# EAGLE board TSC PROJECT_1 v7 (EAGLE 9.7.0)
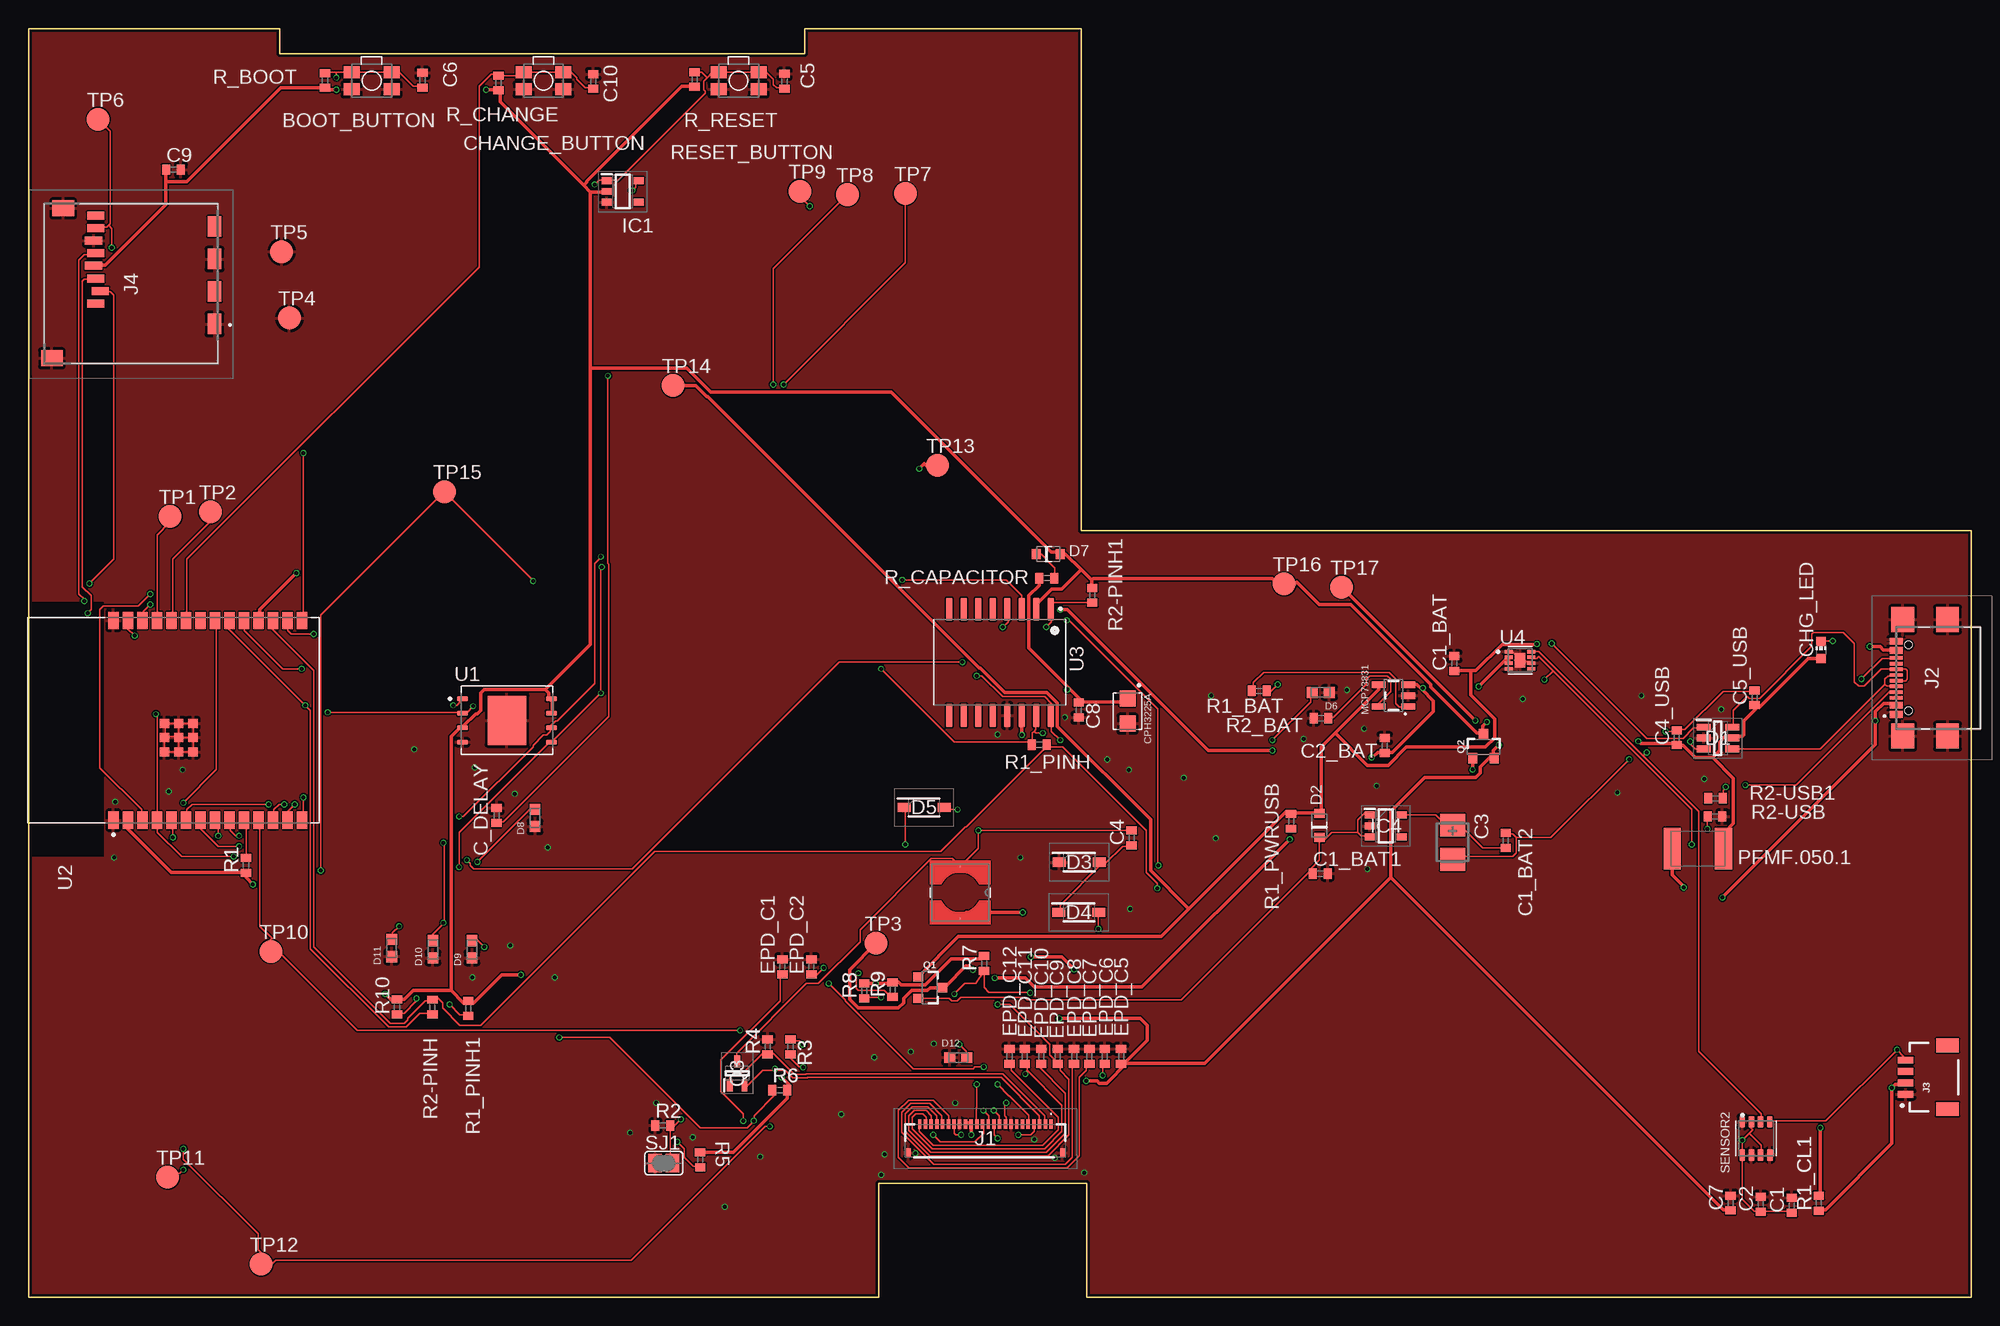
[diagram p0: board, top side]
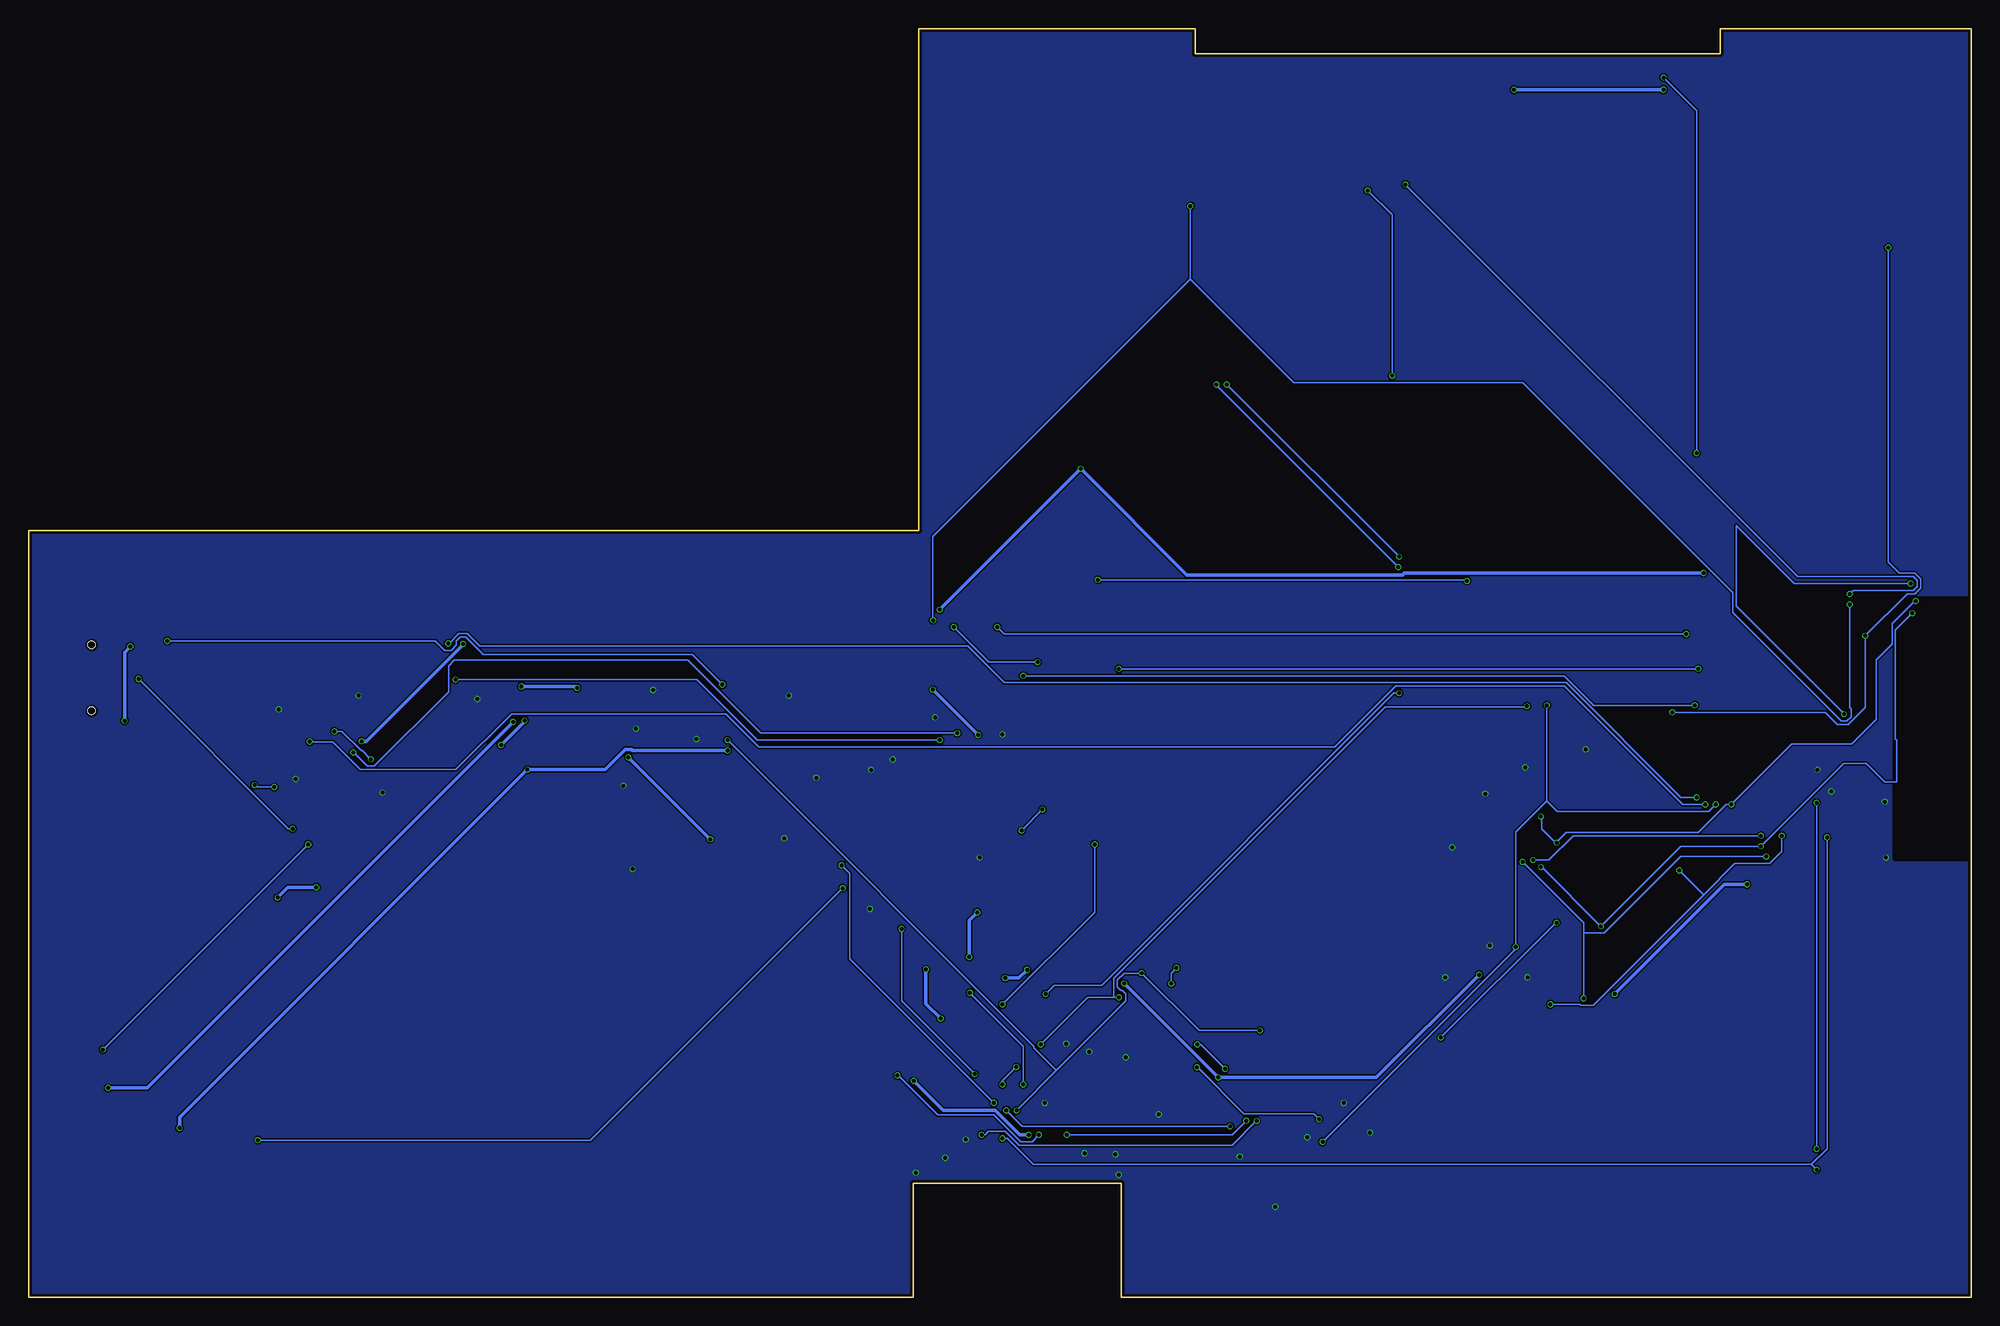
[diagram p1: board, bottom side, seen from below]

Size 170.2 x 111.2 mm. Coordinates in mm from the lower left corner, seen from the top.
Outline: 0,111.2 22,111.2 22,108.99 68,108.99 68,111.2 92.2,111.2 92.2,67.2 170.2,67.2 170.2,0 92.71,0 92.7,10 74.5,10 74.5,0 0,0 0,111.2
Copper layers (1*16): Top 0.035mm / dielectric 1.6mm / Bottom 0.035mm
Design rules "jlcpcb-2layers": minimum track width 5mil, minimum drill 0.3mm, track to track 5mil, track to pad 5mil, pad to pad 5mil, via to via 5mil, smd to smd 5mil, copper to edge 0.2mm, drill to drill 6mil, minimum pad ring 10mil, minimum via ring 3mil, stop-mask expansion 4mil, vias tented up to drill 0mil, thermal gap 10mil

## Footprints (pad centres in the part's own frame; a part is rotated, then mirrored left to right if it is on the bottom)
MYBUTTON = smd 1.4 x 1.05: 1 1.75,0.75; 2 -1.75,0.75; 3 -1.75,-0.75; 4 1.75,-0.75
EAGLE-LTSPICE_C0402 = smd 0.7 x 0.9: 1 -0.65,0; 2 0.65,0
RCL_CT3528 = smd 2 x 2.2: + -1.5,0; - 1.5,0
ADAFRUIT_CHIP-LED0603 = smd 0.8 x 0.8: A 0,-0.75; C 0,0.75
CAPCP3225X100N = smd 1.4 x 1.4: 1 -1.1,0; 2 1.1,0
SOT95P280X145-6N = smd 1.2 x 0.6: 1 -1.25,0.95; 2 -1.25,0; 3 -1.25,-0.95; 4 1.25,-0.95; 5 1.25,0; 6 1.25,0.95
ESP32_WROVER_AVX---SD0805S020S1R0_AVX_SD0805S020S1R0_0 = smd 0.8 x 0.9: 1 -1.05,0; 2 1.05,0
SOD3716X135N = smd 1.15 x 0.8: 1 -1.75,0; 2 1.75,0
DIOC1608X36N = smd 0.97 x 0.94: 1 -0.75,0; 2 0.75,0
SOT95P280X125-5N = smd 0.9 x 0.6: 1 -1.4,0.95; 2 -1.4,0; 3 -1.4,-0.95; 4 1.4,-0.95; 5 1.4,0.95
SOT95P280X120-5N = smd 0.9 x 0.6: 1 -1.4,0.95; 2 -1.4,0; 3 -1.4,-0.95; 4 1.4,-0.95; 5 1.4,0.95
FH34SRJ24S05SH99 = smd 0.3 x 0.8: 1 5.75,1.45; 2 5.25,1.45; 3 4.75,1.45; 4 4.25,1.45; 5 3.75,1.45; 6 3.25,1.45; 7 2.75,1.45; 8 2.25,1.45; 9 1.75,1.45; 10 1.25,1.45; 11 0.75,1.45; 12 0.25,1.45; 13 -0.25,1.45; 14 -0.75,1.45; 15 -1.25,1.45; 16 -1.75,1.45; 17 -2.25,1.45; 18 -2.75,1.45; 19 -3.25,1.45; 20 -3.75,1.45; 21 -4.25,1.45; 22 -4.75,1.45; 23 -5.25,1.45; 24 -5.75,1.45 | smd 0.4 x 0.8: MP1 6.75,-1.05; MP2 -6.75,-1.05
SAMACSYS_PARTS_USB4110GFA = smd 0.3 x 1.15: A1 -3.35,3.678; A4 -2.55,3.678; A5 -1.25,3.678; A6 -0.25,3.678; A7 0.25,3.678; A8 1.25,3.678; A9 2.55,3.678; A12 3.35,3.678; B1 3.05,3.678; B4 2.25,3.678; B5 1.75,3.678; B6 0.75,3.678; B7 -0.75,3.678; B8 -1.75,3.678; B9 -2.25,3.678; B12 -3.05,3.678 | smd 2.18 x 2: MP1 -5.11,-0.827; MP2 5.11,-0.827; MP3 -5.11,3.103; MP4 5.11,3.103 | hole 0.65: -2.89,2.603; 2.89,2.603
JST04_1MM_RA = smd 0.6 x 1.35: 1 -1.5,0; 2 -0.5,0; 3 0.5,0; 4 1.5,0 | smd 1.2 x 2: NC1 2.8,-3.675; NC2 -2.8,-3.675
112ATAARR03ATTEND = smd 1.8 x 1.2: G1 10.6,10.4; G2 4.9,10.4; S1 7.75,10.4; S2 2.05,10.4 | smd 1.4 x 1.9: G3 13.6,-3.85; G4 0.45,-2.85 | smd 0.7 x 1.5: P1 8.8,0; P2 7.7,0.4; P3 6.6,0; P4 5.5,-0.2; P5 4.4,0; P6 3.3,-0.2; P7 2.2,0; P8 1.1,0
IND_4828-WE-TPC_WRE = smd 0.127 x 0.127: 1 -2.286,0; 2 2.286,0
ESP32_WROVER_SPARKFUN-IC-POWER_SOT23-5 = smd 0.55 x 1.2: 1 -0.95,-1.3; 2 0,-1.3; 3 0.95,-1.3; 4 0.95,1.3; 5 -0.95,1.3
ESP32C6_VARISTOR_CT/CN1812 = smd 1.5 x 3.6: 1 -2.25,0; 2 2.25,0
ESP32_WROVER_SPARKFUN-DISCRETESEMI_SOT23-3 = smd 0.8 x 0.9: 1 -0.95,-1; 2 0.95,-1; 3 0,1.1
SOT65P210X110-3N = smd 1.05 x 0.5: 1 -1.05,0.65; 2 -1.05,-0.65; 3 1.05,0
ESP32_WROVER_EAGLE-LTSPICE_R0402 = smd 0.7 x 0.9: 1 -0.65,0; 2 0.65,0
ESP32_WROVER_BME680_PSON80P300X300X100-8N = smd 1.016 x 0.5: 1 1.458,1.2; 2 1.458,0.4; 3 1.458,-0.4; 4 1.458,-1.2; 5 -1.458,-1.22; 6 -1.458,-0.4; 7 -1.458,0.4; 8 -1.458,1.2
SJ = smd 1.168 x 1.6: 1 -0.762,0; 2 0.762,0
TP20R = smd 2 x 2: TP 0,0
SON127P600X800X80-9N = smd 0.94 x 0.44: 1 -3.895,1.905; 2 -3.895,0.635; 3 -3.895,-0.635; 4 -3.895,-1.905; 5 3.895,-1.905; 6 3.895,-0.635; 7 3.895,0.635; 8 3.895,1.905 | smd 3.4 x 4.3: 9 0,0
XCVR_ESP32-C6-WROOM-1-N8 = smd 1.5 x 0.9: 1 -8.75,5.26; 2 -8.75,3.99; 3 -8.75,2.72; 4 -8.75,1.45; 5 -8.75,0.18; 6 -8.75,-1.09; 7 -8.75,-2.36; 8 -8.75,-3.63; 9 -8.75,-4.9; 10 -8.75,-6.17; 11 -8.75,-7.44; 12 -8.75,-8.71; 13 -8.75,-9.98; 14 -8.75,-11.25; 15 8.75,-11.25; 16 8.75,-9.98; 17 8.75,-8.71; 18 8.75,-7.44; 19 8.75,-6.17; 20 8.75,-4.9; 21 8.75,-3.63; 22 8.75,-2.36; 23 8.75,-1.09; 24 8.75,0.18; 25 8.75,1.45; 26 8.75,2.72; 27 8.75,3.99; 28 8.75,5.26 | smd 0.8 x 0.8: 29_1 -2.755,0.79; 29_2 -1.505,0.79; 29_3 -0.255,0.79; 29_4 -2.755,-0.46; 29_5 -1.505,-0.46; 29_6 -0.255,-0.46; 29_7 -2.755,-1.71; 29_8 -1.505,-1.71; 29_9 -0.255,-1.71
SOIC127P1032X265-16N = smd 2.05 x 0.59: 1 -4.655,4.445; 2 -4.655,3.175; 3 -4.655,1.905; 4 -4.655,0.635; 5 -4.655,-0.635; 6 -4.655,-1.905; 7 -4.655,-3.175; 8 -4.655,-4.445; 9 4.655,-4.445; 10 4.655,-3.175; 11 4.655,-1.905; 12 4.655,-0.635; 13 4.655,0.635; 14 4.655,1.905; 15 4.655,3.175; 16 4.655,4.445
SON50P200X200X80-9N = smd 0.76 x 0.27: 1 -0.985,0.75; 2 -0.985,0.25; 3 -0.985,-0.25; 4 -0.985,-0.75; 5 0.985,-0.75; 6 0.985,-0.25; 7 0.985,0.25; 8 0.985,0.75 | smd 0.9 x 1.3: 9 0,0

## Placement (x,y rotation side)
BOOT_BUTTON  BUTTON_CUSYOMV1  [MYBUTTON]  30.06,106.62 180 top
C1  [EAGLE-LTSPICE_C0402]  154.45,8.07 90 top
C1_BAT  [EAGLE-LTSPICE_C0402]  124.89,55.56 90 top
C1_BAT1  [EAGLE-LTSPICE_C0402]  113.16,37.14 0 top
C1_BAT2  [EAGLE-LTSPICE_C0402]  129.4,40.04 90 top
C2  [EAGLE-LTSPICE_C0402]  151.74,8.17 90 top
C2_BAT  [EAGLE-LTSPICE_C0402]  118.8,48.36 90 top
C3  [RCL_CT3528]  124.75,39.89 270 top
C4  [EAGLE-LTSPICE_C0402]  96.63,40.27 90 top
C4_USB  [EAGLE-LTSPICE_C0402]  144.39,49.05 90 top
C5  [EAGLE-LTSPICE_C0402]  66.22,106.57 90 top
C5_USB  [EAGLE-LTSPICE_C0402]  151.2,52.55 90 top
C6  [EAGLE-LTSPICE_C0402]  34.51,106.67 90 top
C7  [EAGLE-LTSPICE_C0402]  149.1,8.27 90 top
C8  [EAGLE-LTSPICE_C0402]  91.99,51.47 270 top
C9  [EAGLE-LTSPICE_C0402]  12.7,98.83 0 top
C10  [EAGLE-LTSPICE_C0402]  49.46,106.56 90 top
C_DELAY  [EAGLE-LTSPICE_C0402]  41,42.24 90 top
CHANGE_BUTTON  BUTTON_CUSYOMV1  [MYBUTTON]  45.11,106.62 180 top
CHG_LED  [ADAFRUIT_CHIP-LED0603]  157.02,56.74 0 top
CPH3225A  CPH3225A  [CAPCP3225X100N]  96.27,51.39 270 top
D1  USBLC6-2SC6Y  [SOT95P280X145-6N]  147.99,49.02 0 top
D2  ESP32_WROVER_AVX---SD0805S020S1R0_AVX_SD0805S020S1R0_0_0AVX_SD0805S020S1R0_0_0  [ESP32_WROVER_AVX---SD0805S020S1R0_AVX_SD0805S020S1R0_0]  113.08,41.35 90 top
D3  MBR0530  [SOD3716X135N]  92.04,38.14 0 top
D4  MBR0530  [SOD3716X135N]  92.01,33.75 0 top
D5  MBR0530  [SOD3716X135N]  78.45,42.95 0 top
D6  PGB1010603MR  [DIOC1608X36N]  113.19,53.02 180 top
D7  ESP32_WROVER_AVX---SD0805S020S1R0_AVX_SD0805S020S1R0_0_0AVX_SD0805S020S1R0_0_0  [ESP32_WROVER_AVX---SD0805S020S1R0_AVX_SD0805S020S1R0_0]  89.33,65.15 0 top
D8  PGB1010603MR  [DIOC1608X36N]  44.37,42.02 90 top
D9  PGB1010603MR  [DIOC1608X36N]  38.85,30.52 90 top
D10  PGB1010603MR  [DIOC1608X36N]  35.43,30.52 90 top
D11  PGB1010603MR  [DIOC1608X36N]  31.81,30.62 90 top
D12  PGB1010603MR  [DIOC1608X36N]  81.44,21.03 0 top
EPD_C1  [EAGLE-LTSPICE_C0402]  66.04,28.98 90 top
EPD_C2  [EAGLE-LTSPICE_C0402]  68.58,28.98 90 top
EPD_C5  [EAGLE-LTSPICE_C0402]  95.71,21.13 90 top
EPD_C6  [EAGLE-LTSPICE_C0402]  94.27,21.13 90 top
EPD_C7  [EAGLE-LTSPICE_C0402]  92.93,21.13 90 top
EPD_C8  [EAGLE-LTSPICE_C0402]  91.59,21.13 90 top
EPD_C9  [EAGLE-LTSPICE_C0402]  90.15,21.13 90 top
EPD_C10  [EAGLE-LTSPICE_C0402]  88.71,21.13 90 top
EPD_C11  [EAGLE-LTSPICE_C0402]  87.27,21.13 90 top
EPD_C12  [EAGLE-LTSPICE_C0402]  85.93,21.13 90 top
IC1  BD5229G-TR  [SOT95P280X125-5N]  52.06,96.92 0 top
IC4  XC6220A331MR-G  [SOT95P280X120-5N]  118.9,41.32 0 top
J1  FH34SRJ-24S-0.5SH_99_  [FH34SRJ24S05SH99]  83.82,13.74 0 top
J2  SAMACSYS_PARTS_USB4110-GF-A  [SAMACSYS_PARTS_USB4110GFA]  167.28,54.3 90 top
J3  QWIIC_RIGHT_ANGLE  [JST04_1MM_RA]  164.43,19.3 90 top
J4  112A-TAAR-R03_ATTEND  [112ATAARR03ATTEND]  5.89,95.9 270 top
L1  744043680IND_4828-WE-TPC_WRE  [IND_4828-WE-TPC_WRE]  81.62,35.49 270 top
MCP73831  ESP32_WROVER_SPARKFUN-IC-POWER_MCP73831  [ESP32_WROVER_SPARKFUN-IC-POWER_SOT23-5]  119.57,52.74 90 top
PFMF.050.1  ESP32C6_VARISTORCN1812  [ESP32C6_VARISTOR_CT/CN1812]  146.23,39.33 0 top
Q1  20V/4.2A/52mΩ/1.4W  [ESP32_WROVER_SPARKFUN-DISCRETESEMI_SOT23-3]  78.94,27.15 270 top
Q2  20V/4.2A/52mΩ/1.4W  [ESP32_WROVER_SPARKFUN-DISCRETESEMI_SOT23-3]  127.46,48.25 0 top
Q3  SI1308EDL-T1-GE3  [SOT65P210X110-3N]  62.08,19.65 90 top
R1  [ESP32_WROVER_EAGLE-LTSPICE_R0402]  19.05,37.87 90 top
R1_BAT  [ESP32_WROVER_EAGLE-LTSPICE_R0402]  107.81,53.16 0 top
R1_CL1  [ESP32_WROVER_EAGLE-LTSPICE_R0402]  156.83,8.26 90 top
R1_PINH  [ESP32_WROVER_EAGLE-LTSPICE_R0402]  88.54,48.44 0 top
R1_PINH1  [ESP32_WROVER_EAGLE-LTSPICE_R0402]  38.51,25.33 90 top
R1_PWRUSB  [ESP32_WROVER_EAGLE-LTSPICE_R0402]  110.6,41.73 90 top
R2  [ESP32_WROVER_EAGLE-LTSPICE_R0402]  55.56,15.07 0 top
R2-PINH  [ESP32_WROVER_EAGLE-LTSPICE_R0402]  35.38,25.45 90 top
R2-PINH1  [ESP32_WROVER_EAGLE-LTSPICE_R0402]  93.19,61.53 90 top
R2-USB  [ESP32_WROVER_EAGLE-LTSPICE_R0402]  147.74,42.16 0 top
R2-USB1  [ESP32_WROVER_EAGLE-LTSPICE_R0402]  147.78,43.74 0 top
R2_BAT  [ESP32_WROVER_EAGLE-LTSPICE_R0402]  113.22,50.76 0 top
R3  [ESP32_WROVER_EAGLE-LTSPICE_R0402]  66.75,21.97 270 top
R4  [ESP32_WROVER_EAGLE-LTSPICE_R0402]  64.74,21.97 90 top
R5  [ESP32_WROVER_EAGLE-LTSPICE_R0402]  58.83,12.07 90.7 top
R6  [ESP32_WROVER_EAGLE-LTSPICE_R0402]  65.82,18.17 0 top
R7  [ESP32_WROVER_EAGLE-LTSPICE_R0402]  83.71,29.27 90 top
R8  [ESP32_WROVER_EAGLE-LTSPICE_R0402]  73.2,26.87 90 top
R9  [ESP32_WROVER_EAGLE-LTSPICE_R0402]  75.69,26.97 90 top
R10  [ESP32_WROVER_EAGLE-LTSPICE_R0402]  32.28,25.46 90 top
R_BOOT  [ESP32_WROVER_EAGLE-LTSPICE_R0402]  25.97,106.65 90 top
R_CAPACITOR  [ESP32_WROVER_EAGLE-LTSPICE_R0402]  89.2,63.03 0 top
R_CHANGE  [ESP32_WROVER_EAGLE-LTSPICE_R0402]  41.17,106.43 90 top
R_RESET  [ESP32_WROVER_EAGLE-LTSPICE_R0402]  58.35,106.73 90 top
RESET_BUTTON  BUTTON_CUSYOMV1  [MYBUTTON]  62.2,106.62 180 top
SENSOR2  ESP32_WROVER_BME680_BME680  [ESP32_WROVER_BME680_PSON80P300X300X100-8N]  151.33,13.94 90 top
SJ1  [SJ]  55.65,11.77 0 top
TP1  TPTP20R  [TP20R]  12.4,68.44 0 top
TP2  TPTP20R  [TP20R]  15.92,68.84 0 top
TP3  TPTP20R  [TP20R]  74.24,31.04 0 top
TP4  TPTP20R  [TP20R]  22.86,85.84 0 top
TP5  TPTP20R  [TP20R]  22.18,91.64 0 top
TP6  TPTP20R  [TP20R]  6.1,103.24 0 top
TP7  TPTP20R  [TP20R]  76.82,96.74 0 top
TP8  TPTP20R  [TP20R]  71.74,96.64 0 top
TP9  TPTP20R  [TP20R]  67.56,96.94 0 top
TP10  TPTP20R  [TP20R]  21.22,30.32 0 top
TP11  TPTP20R  [TP20R]  12.18,10.54 0 top
TP12  TPTP20R  [TP20R]  20.37,2.92 0 top
TP13  TPTP20R  [TP20R]  79.62,72.92 0 top
TP14  TPTP20R  [TP20R]  56.47,79.92 0 top
TP15  TPTP20R  [TP20R]  36.42,70.62 0 top
TP16  TPTP20R  [TP20R]  109.98,62.54 0 top
TP17  TPTP20R  [TP20R]  115.03,62.24 0 top
U1  W25Q512JVEIQ  [SON127P600X800X80-9N]  41.91,50.57 0 top
U2  ESP32-C6-WROOM-1-N8  [XCVR_ESP32-C6-WROOM-1-N8]  12.7,50.57 90 top
U3  DS3231SN#  [SOIC127P1032X265-16N]  85.09,55.65 270 top
U4  MAX17048G+T10  [SON50P200X200X80-9N]  130.66,55.84 0 top

## Library data of the parts
BOOT_BUTTON CHANGE_BUTTON CHG_LED PFMF.050.1 RESET_BUTTON SJ1 TP1-TP17 = DeskAssistant v19 v1
C1 C1_BAT C1_BAT1 C1_BAT2 C2 C2_BAT C4 C4_USB C5 C5_USB C6-C10 C_DELAY EPD_C1 EPD_C2 EPD_C5-EPD_C12 = DeskAssistant v19 v1; SPICEMODEL: NONE; SPICEPREFIX: C
C3 = DeskAssistant v19 v1; SPICEPREFIX: C
CPH3225A = DeskAssistant v19 v1; AVAILABILITY: Not in stock; CHECK_PRICES: https://www.snapeda.com/parts/CPH3225A/Seiko+Instruments/view-part/?ref=eda; DESCRIPTION: 11 mF (EDLC) Supercapacitor 3.3 V 1210 (3225 Metric) - -; MF: Seiko Instruments; MP: CPH3225A; PACKAGE: 1210 Seiko; PRICE: None; PURCHASE-URL: https://www.snapeda.com/api/url_track_click_mouser/?unipart_id=562593&manufacturer=Seiko Instruments&part_name=CPH3225A&search_term=None; SNAPEDA_LINK: https://www.snapeda.com/parts/CPH3225A/Seiko+Instruments/view-part/?ref=snap
D1 = DeskAssistant v19 v1; AVAILABILITY: In Stock; CHECK_PRICES: https://www.snapeda.com/parts/USBLC6-2SC6Y/STMicroelectronics/view-part/?ref=eda; DESCRIPTION: 17V Clamp 5A (8/20µs) Ipp Tvs Diode Surface Mount SOT-23-6; MF: STMicroelectronics; MP: USBLC6-2SC6Y; PACKAGE: SOT-23-6 STMicroelectronics; PRICE: None; SNAPEDA_LINK: https://www.snapeda.com/parts/USBLC6-2SC6Y/STMicroelectronics/view-part/?ref=snap
D2 D7 = DeskAssistant v19 v1; CENTROID_NOT_SPECIFIED: No; DATASHEET: http://datasheets.avx.com/schottky.pdf; DIGIKEY_DESCRIPTION: DIODE SCHOTTKY 20V 1A 0805; DIGIKEY_PART_NUMBER: 478-7800-1-ND; LEAD_FREE: yes; MF: AVX; MOUSER_PART_NUMBER: 581-SD0805S020S1R0; PACKAGE: 0805 (2012 metric); PREFIX: D; ROHS: yes; TEMPERATURE_RANGE_HIGH: +125°C; TEMPERATURE_RANGE_LOW: -55°C
D3-D5 = DeskAssistant v19 v1; AVAILABILITY: In Stock; CHECK_PRICES: https://www.snapeda.com/parts/MBR0530/Onsemi/view-part/?ref=eda; DESCRIPTION: Diode Schottky 30 V 500mA Surface Mount SOD-123; MF: ON Semiconductor; MP: MBR0530; PACKAGE: SOD-123-2 ON Semiconductor; PRICE: None; PURCHASE-URL: https://www.snapeda.com/api/url_track_click_mouser/?unipart_id=179458&manufacturer=ON Semiconductor&part_name=MBR0530&search_term=None; SNAPEDA_LINK: https://www.snapeda.com/parts/MBR0530/Onsemi/view-part/?ref=snap
D6 D8-D12 = DeskAssistant v19 v1; AVAILABILITY: In Stock; CHECK_PRICES: https://www.snapeda.com/parts/PGB1010603MR/Littelfuse/view-part/?ref=eda; DESCRIPTION: 150V (Typ) Clamp - Ipp Tvs Diode Surface Mount 0603 (1608 Metric); MF: Littelfuse Inc.; MP: PGB1010603MR; PACKAGE: 0603 Littelfuse Inc.; PRICE: None; PURCHASE-URL: https://www.snapeda.com/api/url_track_click_mouser/?unipart_id=5659453&manufacturer=Littelfuse Inc.&part_name=PGB1010603MR&search_term=None; SNAPEDA_LINK: https://www.snapeda.com/parts/PGB1010603MR/Littelfuse/view-part/?ref=snap
IC1 = DeskAssistant v19 v1; DESCRIPTION: Voltage Detector with Adjustable Delay Time: CMOS processes are utilized to develop high precision, low current consumption CMOS reset ICs that allow arbitrary setting of the delay time. The extensive lineup includes both Nch Open Drain and CMOS output types in a wide range of detection voltages (from 2.3V to 6.0V, in 0.1V steps), enabling selection of the ideal solution based on customer requirements. In addition, the entire series is of course both lead-free and RoHS-compliant.; HEIGHT: 1.25mm; MANUFACTURER_NAME: ROHM Semiconductor; MANUFACTURER_PART_NUMBER: BD5229G-TR; MOUSER_PART_NUMBER: 755-BD5229G-TR; MOUSER_PRICE-STOCK: https://www.mouser.co.uk/ProductDetail/ROHM-Semiconductor/BD5229G-TR?qs=4kLU8WoGk0vvnhrrYwdszw%3D%3D
IC4 = DeskAssistant v19 v1; DESCRIPTION: LDO Voltage Regulators; HEIGHT: 1.2mm; MANUFACTURER_NAME: Torex; MANUFACTURER_PART_NUMBER: XC6220A331MR-G; MOUSER_PART_NUMBER: 865-XC6220A331MR-G; MOUSER_PRICE-STOCK: https://www.mouser.co.uk/ProductDetail/Torex-Semiconductor/XC6220A331MR-G?qs=AsjdqWjXhJ8ZSWznL1J0gg%3D%3D
J1 = DeskAssistant v19 v1; DESCRIPTION: 24 Position FFC, FPC Connector Contacts, Top and Bottom 0.020" (0.50mm) Surface Mount, Right Angle; HEIGHT: 1.1mm; MANUFACTURER_NAME: Hirose; MANUFACTURER_PART_NUMBER: FH34SRJ-24S-0.5SH(99); MOUSER_PART_NUMBER: 798-FH34SRJ24S05SH99; MOUSER_PRICE-STOCK: https://www.mouser.co.uk/ProductDetail/Hirose-Connector/FH34SRJ-24S-0.5SH99?qs=vcbW%252B4%252BSTIpKBl5ap9J8Fw%3D%3D
J2 = DeskAssistant v19 v1; DESCRIPTION: CONN USB 2.0 TYPE-C R/A SMT; HEIGHT: 3.26mm; MANUFACTURER_NAME: GCT (GLOBAL CONNECTOR TECHNOLOGY); MANUFACTURER_PART_NUMBER: USB4110-GF-A; MOUSER_PART_NUMBER: 640-USB4110-GF-A; MOUSER_PRICE-STOCK: https://www.mouser.co.uk/ProductDetail/GCT/USB4110-GF-A?qs=KUoIvG%2F9IlYiZvIXQjyJeA%3D%3D
J3 = DeskAssistant v19 v1; PROD_ID: CONN-13694
J4 = DeskAssistant v19 v1; DESCRIPTION: Micro SD Card Socket, Push-Push Type, Top Mount, SMT, H=1.83mm, 10u; HEIGHT: 1.9mm; MANUFACTURER_NAME: ATTEND; MANUFACTURER_PART_NUMBER: 112A-TAAR-R03 ATTEND
L1 = DeskAssistant v19 v1; COPYRIGHT: Copyright (C) 2024 Ultra Librarian. All rights reserved.; MANUFACTURER_PART_NUMBER: 744043680; MFR_NAME: Wurth Electronics
MCP73831 = DeskAssistant v19 v1; PROD_ID: IC-09995
Q1 Q2 = DeskAssistant v19 v1; PROD_ID: TRAN-14388
Q3 = DeskAssistant v19 v1; AVAILABILITY: In Stock; CHECK_PRICES: https://www.snapeda.com/parts/SI1308EDL-T1-GE3/Vishay+Siliconix/view-part/?ref=eda; DESCRIPTION: Si1308EDL-T1-GE3 N-channel MOSFET Transistor, 1.5 A, 30 V, 3-Pin SC-70 | Siliconix / Vishay SI1308EDL-T1-GE3; MF: Vishay Siliconix; MP: SI1308EDL-T1-GE3; PACKAGE: SOT-323 Vishay Semiconductor; PRICE: None; PURCHASE-URL: https://www.snapeda.com/api/url_track_click_mouser/?unipart_id=274603&manufacturer=Vishay Siliconix&part_name=SI1308EDL-T1-GE3&search_term=None; SNAPEDA_LINK: https://www.snapeda.com/parts/SI1308EDL-T1-GE3/Vishay+Siliconix/view-part/?ref=snap
R1 R1_BAT R1_CL1 R1_PINH R1_PINH1 R1_PWRUSB R2 R2-PINH R2-PINH1 R2-USB R2-USB1 R2_BAT R3-R10 R_BOOT R_CAPACITOR R_CHANGE R_RESET = DeskAssistant v19 v1; SPICEMODEL: NONE; SPICEPREFIX: R
SENSOR2 = DeskAssistant v19 v1; AVAILABILITY: Unavailable; DESCRIPTION: Integrated Environmental Unit; MF: Bosch Sensortec; MP: BME680; PACKAGE: LGA-8 Bosch Tools; PRICE: None
U1 = DeskAssistant v19 v1; AVAILABILITY: In Stock; CHECK_PRICES: https://www.snapeda.com/parts/W25Q512JVEIQ/Winbond+Electronics/view-part/?ref=eda; DESCRIPTION: FLASH - NOR Memory IC 512Mb (64M x 8) SPI - Quad I/O 133 MHz 8-WSON (8x6); MF: Winbond Electronics; MP: W25Q512JVEIQ; PACKAGE: Package; PRICE: None; SNAPEDA_LINK: https://www.snapeda.com/parts/W25Q512JVEIQ/Winbond+Electronics/view-part/?ref=snap
U2 = DeskAssistant v19 v1; AVAILABILITY: In Stock; CHECK_PRICES: https://www.snapeda.com/parts/ESP32-C6-WROOM-1-N8/Espressif+Systems/view-part/?ref=eda; DESCRIPTION: Multiprotocol Modules ESP32-C6 module, Wi-Fi 6 in 2.4 GHz band, Bluetooth 5, Zigbee 3.0 and Thread. ESP34-WROOM Compatible - ENGINEERING SAMPLE; MF: Espressif Systems; MP: ESP32-C6-WROOM-1-N8; PACKAGE: None; PRICE: None; SNAPEDA_LINK: https://www.snapeda.com/parts/ESP32-C6-WROOM-1-N8/Espressif+Systems/view-part/?ref=snap
U3 = DeskAssistant v19 v1; AVAILABILITY: In Stock; CHECK_PRICES: https://www.snapeda.com/parts/DS3231SN%23/Analog+Devices/view-part/?ref=eda; DESCRIPTION: Extremely Accurate I²C-Integrated RTC/TCXO/Crystal; MF: Analog Devices; MP: DS3231SN#; PACKAGE: SOIC-16 Maxim; PRICE: None; PURCHASE-URL: https://www.snapeda.com/api/url_track_click_mouser/?unipart_id=99048&manufacturer=Analog Devices&part_name=DS3231SN#&search_term=None; SNAPEDA_LINK: https://www.snapeda.com/parts/DS3231SN%23/Analog+Devices/view-part/?ref=snap
U4 = DeskAssistant v19 v1; AVAILABILITY: In Stock; CHECK_PRICES: https://www.snapeda.com/parts/MAX17048G+T10/Analog+Devices/view-part/?ref=eda; DESCRIPTION: 3µA 1-Cell/2-Cell Fuel Gauge with ModelGauge; MF: Analog Devices; MP: MAX17048G+T10; PACKAGE: TDFN-8 Maxim; PRICE: None; PURCHASE-URL: https://www.snapeda.com/api/url_track_click_mouser/?unipart_id=329239&manufacturer=Analog Devices&part_name=MAX17048G+T10&search_term=None; SNAPEDA_LINK: https://www.snapeda.com/parts/MAX17048G+T10/Analog+Devices/view-part/?ref=snap

## Nets
3V3: C9.1 D7.2 IC1.2 J3.2 J4.P4 Q2.3 R1.1 R1_CL1.1 R1_PINH1.2 R2-PINH1.2 R5.2 R6.2 R7.2 R8.2 R9.2 R10.2 R_BOOT.1 R_CHANGE.1 R_RESET.1 TP16.TP U1.3 U1.7 U1.8 U2.2 U3.2
4.7UF: C1_BAT2.2 C3.- C4_USB.2 C5_USB.2
32KHZ: R2-PINH1.1 U2.9 U3.1
100K: R1_PWRUSB.1
100UFTANT: C1_BAT2.1 C3.+ IC4.5
DN: D1.4 J2.A7 J2.B7
DP: D1.6 J2.A6 J2.B6
EPD_3V3: C7.1 EPD_C5.1 J1.15 J1.16 L1.2 Q2.2 TP17.TP
EPD_3V3_C: Q2.1 R1_CL1.2 TP13.TP U2.18
EPD_BUSY: J1.9 TP9.TP U2.26
EPD_CS: D6.2 J1.12 R9.1 TP10.TP U2.11
EPD_DC: J1.11 TP11.TP U2.5
EPD_RST: J1.10 TP12.TP U2.21
FLASH_CS: D9.2 R5.1 U1.1 U2.12
GDR: J1.2 Q3.1 R4.1
GND: BOOT_BUTTON.1 BOOT_BUTTON.2 C1.2 C1_BAT1.2 C1_BAT.2 C2.2 C2_BAT.2 C5.2 C6.2 C7.2 C8.2 C9.2 C10.2 C_DELAY.2 CHANGE_BUTTON.1 CHANGE_BUTTON.2 CPH3225A.2 D1.2 D3.1 D6.1 D8.1 D9.1 D10.1 D11.1 D12.1 EPD_C1.2 EPD_C2.2 EPD_C5.2 EPD_C6.2 EPD_C7.2 EPD_C8.2 EPD_C9.2 EPD_C10.2 EPD_C11.2 EPD_C12.2 IC1.3 IC4.2 J1.8 J1.17 J1.MP1 J1.MP2 J2.A12 J2.B1 J2.B12 J2.MP1 J2.MP2 J2.MP3 J2.MP4 J3.1 J4.G1 J4.G2 J4.G3 J4.G4 J4.P6 MCP73831.2 R2-USB.2 R2.1 R2_BAT.1 R4.2 RESET_BUTTON.1 RESET_BUTTON.2 SENSOR2.1 SENSOR2.5 SENSOR2.7 SJ1.1 TP4.TP TP5.TP U1.4 U1.9 U2.1 U2.28 U2.29_1 U2.29_2 U2.29_3 U2.29_4 U2.29_5 U2.29_6 U2.29_7 U2.29_8 U2.29_9 U3.13 U4.1 U4.4 U4.6 U4.9
GPIO8: R1.2 U2.10
I2C_PW: C1.1 C2.1 R1_PINH.2 R2-PINH.2 SENSOR2.2 SENSOR2.6 SENSOR2.8 U2.17
INT_RTC: R1_PINH1.1 TP15.TP U2.8 U3.3
IO/BOOT: BOOT_BUTTON.3 BOOT_BUTTON.4 C6.1 R_BOOT.2 U2.15
IO/CHANGE: C10.1 CHANGE_BUTTON.3 CHANGE_BUTTON.4 R_CHANGE.2 U2.23
MISO: D12.2 J4.P7 R8.1 TP6.TP U1.2 U2.27
MOSI: D11.2 J1.14 J4.P3 R7.1 TP7.TP U1.5 U2.7
N$1: J2.A1
N$2: J2.A5 R2-USB1.2
N$3: J2.B5 R2-USB.1
N$4: C4.1 D3.2 D4.1
N$6: MCP73831.1 R1_BAT.1
N$7: CHG_LED.C R1_BAT.2
N$8: MCP73831.5 R2_BAT.2
N$9: EPD_C12.1 J1.24
N$10: EPD_C2.1 J1.5
N$11: EPD_C10.1 J1.22
N$12: C_DELAY.1 IC1.5
N$13: EPD_C8.1 J1.20
N$14: EPD_C7.1 J1.19
N$15: EPD_C6.1 J1.18
N$16: EPD_C1.1 J1.4
N$17: D7.1 R_CAPACITOR.2
PREVGH: D5.1 EPD_C9.1 J1.21
PREVGL: D4.2 EPD_C11.1 J1.23
R2-USB1: R2-USB1.1
RESE: J1.3 Q3.2 R3.1
RESE': R2.2 R3.2 SJ1.2
RESET: C5.1 IC1.1 R_RESET.2 RESET_BUTTON.3 RESET_BUTTON.4 U2.3
RTC_RST: U2.16 U3.4
RX: TP2.TP U2.24
SCA: J3.3
SCK: D10.2 J1.13 J4.P5 R6.1 TP8.TP U1.6 U2.6
SCL: J3.4 R2-PINH.1 SENSOR2.4 U2.20 U3.16 U4.7
SD0805S020S1R0: C1_BAT1.1 D2.1 IC4.1 IC4.3 Q1.2
SDA: R1_PINH.1 SENSOR2.3 U2.19 U3.15 U4.8
SRC: C4.2 D5.2 L1.1 Q3.3
SS_SD: D8.2 J4.P2 R10.1 U2.4
TX: TP1.TP U2.25
USB_D+: D1.1 U2.14
USB_D-: D1.3 U2.13
VBAT: C2_BAT.1 MCP73831.3 Q1.3 TP3.TP U4.2 U4.3
VBUS: C1_BAT.1 C4_USB.1 C5_USB.1 CHG_LED.A D1.5 D2.2 MCP73831.4 PFMF.050.1.2 Q1.1 R1_PWRUSB.2 TP14.TP
VRTC: C8.1 CPH3225A.1 R_CAPACITOR.1 U3.14
VUSB: J2.A4 J2.A9 J2.B4 J2.B9 PFMF.050.1.1

## Tracks (layer width: path | path; a pad name or v marks a point on that pad's centre or on a via)
3V3  (via drill 0.35)
  Top 0.305: R1_CL1.1 156.97,7.7 157.43,7.7 163.22,13.49 v163.22,18.36 163.53,18.67 164.29,18.67 J3.2 | 93.12,62.86 93.12,62.25 R2-PINH1.2 | 92.2,63.78 90.83,65.15 90.53,65.15 D7.2 90.37,65.3 89.61,65.3 75.59,79.32 59.78,79.32 57.64,81.46 49.22,81.46 | 92.2,63.78 93.12,62.86 | 92.2,63.78 90.53,62.1 89.62,62.1 88.27,60.74 U3.2 | 93.12,62.86 93.27,63.02 108.97,63.02 109.42,62.56 109.88,62.56 TP16.TP 110.03,62.56 110.95,62.56 111.1,62.71 113.08,60.73 115.82,60.73 122.83,53.72 122.83,53.49 126.87,49.45 127.41,49.45 | 127.41,49.45 Q2.3 | 49.22,96.85 48.62,97.46 | 48.62,97.46 41.3,104.77 41.3,105.69 R_CHANGE.1 41.15,105.84 v40.08,105.84 | 49.22,96.85 50.6,96.85 IC1.2 | R_RESET.1 58.22,106.15 57.23,106.15 48.9,97.81 48.9,97.74 48.62,97.46 | 12.04,97.76 12.04,95.78 6.71,90.45 5.79,90.45 J4.P4 | 12.04,97.76 C9.1 | 12.04,97.76 13.87,97.76 22.1,105.99 25.91,105.99 R_BOOT.1 26.06,105.99 26.21,105.84 v26.98,105.84 | R8.2 73.3,27.51 v74.22,27.51 75.59,27.51 R9.2 75.74,27.66 76.2,27.66 76.46,27.39 78.57,27.39 80.83,29.66 83.45,29.66 R7.2 | R5.2 61.72,12.72 66.45,17.45 66.45,18.06 R6.2 66.6,18.21 66.6,18.67 v65.99,19.28 | U2.2 8.69,41.68 8.69,41.07 12.5,37.26 19.05,37.26 R1.1 19.05,36.8 v19.66,36.19 | 37.03,26.9 33.68,26.9 32.92,26.14 32.31,26.14 R10.2 32.16,25.98 31.85,25.98 v31.24,26.59 | 37.03,26.9 38.1,25.83 38.41,25.83 R1_PINH1.2 38.56,25.83 39.01,25.83 41.45,28.27 v43.13,28.27 | 45.26,53.26 39.93,53.26 39.62,52.96 39.62,51.43 39.32,51.13 39.17,51.13 38.1,50.06 U1.3 37.95,50.06 37.03,49.15 37.03,26.9 | 45.26,53.26 45.57,52.96 45.57,52.5 45.72,52.35 U1.8 45.87,52.35 45.87,51.28 U1.7
  Top 0.305: 49.22,81.46 49.22,57.23 45.26,53.26 | 49.22,81.46 49.22,96.85 | v127.75,50.43 127.41,50.08 127.41,49.45
  Bottom 0.305: v26.98,105.84 v40.08,105.84 | v74.22,27.51 v65.99,19.28 52.12,19.28 v43.13,28.27 | v19.66,36.19 21.64,36.19 v31.24,26.59 | v127.75,50.43 159.81,18.36 v163.22,18.36
4.7UF  (via drill 0.35)
  Top 0.152: 130.3,40.31 130,40.61 129.54,40.61 C1_BAT2.2 | 130.3,40.31 130.3,38.94 130,38.63 124.97,38.63 124.82,38.48 C3.- | C5_USB.2 151.18,53.11 148.44,53.11 145.09,49.76 144.47,49.76 C4_USB.2 144.32,49.61 v143.41,49.61 | 130.3,40.31 133.35,40.31 v140.21,47.17
  Bottom 0.152: v140.21,47.17 140.97,47.93 141.07,47.93 142.74,49.61 v143.41,49.61
32KHZ  (via drill 0.35)
  Top 0.152: R2-PINH1.1 93.12,60.88 89.76,60.88 89.61,60.73 89.61,60.42 U3.1 89.61,60.27 89.61,59.21 v89.15,58.75 | v18.44,40.46 18.14,40.46 17.68,40.92 17.68,41.68 U2.9 | v38.41,38.33 38.71,38.02 38.71,37.87 39.01,37.56 52.88,37.56 71.02,55.7 81.79,55.7 v81.81,55.67
  Bottom 0.152: v89.15,58.75 86.11,55.7 81.84,55.7 v81.81,55.67 | v18.44,40.46 34.88,40.46 37.02,38.33 v38.41,38.33
100UFTANT
  Top 0.152: IC4.5 120.4,42.29 123.29,42.29 124.05,41.53 124.66,41.53 C3.+ 124.82,41.38 125.43,41.38 127.41,39.39 129.39,39.39 C1_BAT2.1
DN
  Top 0.152: 162.61,53.72 162.76,53.57 163.53,53.57 J2.B7 | 162.61,53.72 162.61,54.18 162.92,54.48 163.53,54.48 J2.A7 | 162.61,53.72 156.97,48.08 149.35,48.08 D1.4
DP
  Top 0.152: J2.A6 163.68,54.02 164.44,54.02 164.59,54.18 164.59,54.94 164.44,55.09 163.68,55.09 J2.B6 163.53,55.09 162.31,55.09 160.81,53.59 160.31,53.59 159.95,53.95 159.95,57.29 158.95,58.29 156.36,58.29 156.21,58.14 156.21,57.07 151.64,52.5 150.72,52.5 150.57,52.65 149.35,51.43 149.35,50.06 D1.6
EPD_3V3  (via drill 0.35)
  Top 0.305: J1.16 82.14,15.32 82.45,15.32 J1.15 82.6,15.16 v82.6,14.25 | 119.33,36.8 148.44,7.7 149.05,7.7 C7.1 | 119.33,36.8 119.33,42.59 122.3,45.57 126.78,45.57 127.18,45.97 127.18,46.48 128.02,47.32 128.32,47.32 | 96.16,20.5 103.02,20.5 119.33,36.8 | 96.16,20.5 95.86,20.5 EPD_C5.1 95.93,20.48 97.99,22.54 97.99,23.84 97.39,24.44 v90.29,24.44 | TP17.TP 115.06,62.1 115.52,61.64 115.67,61.64 126.75,50.57 v126.75,50.55 | 128.32,47.32 Q2.2 | 128.32,47.32 128.32,47.92 v128.8,48.41 | v92.66,18.97 93.6,18.97 93.8,18.77 94.44,18.77 96.16,20.5 | L1.2 82.16,33.74 v87.09,33.74 | v87.79,29.84 90.49,29.84 v91.59,28.74
  Bottom 0.305: v82.6,14.25 83.36,14.25 85.5,16.38 90.07,16.38 v92.66,18.97 | v128.8,48.41 126.82,50.39 126.82,50.47 v126.75,50.55 | v87.09,33.74 87.79,33.04 v87.79,29.84 | v91.59,28.74 91.59,25.74 v90.29,24.44
EPD_3V3_C  (via drill 0.35)
  Top 0.305: v156.97,14.86 156.97,8.91 R1_CL1.2 | v126.49,46.25 126.49,47.17 Q2.1 | v23.47,63.47 20.27,60.27 20.27,59.36 U2.18 | v78.03,72.62 78.49,73.07 78.64,72.92 79.55,72.92 TP13.TP | v108.97,47.93 103.33,47.93 90.98,60.27 v90.37,60.27
  Bottom 0.305: v156.97,14.86 156.97,15.77 v126.49,46.25 119.69,46.25 117.94,48 117.37,48 117.29,47.93 v108.97,47.93 | v23.47,63.47 49.68,63.47 49.84,63.32 68.73,63.32 v78.03,72.62 v90.37,60.27
EPD_BUSY  (via drill 0.35)
  Top 0.152: v68.43,95.63 67.67,96.39 67.67,96.85 TP9.TP | J1.9 85.65,15.32 85.65,15.77 85.5,15.92 85.5,16.84 85.65,16.99 v85.65,17.07 | v10.67,60.73 10.06,60.12 10.06,59.36 U2.26 | v90.96,59.33 91.15,59.33 98.91,51.58 98.91,37.94 v98.98,37.87
  Bottom 0.152: v68.43,95.63 68.43,89.23 | 68.43,89.23 59.36,80.17 39.3,80.17 20.92,61.78 20.92,60.02 11.41,50.51 10.91,50.51 10.55,50.86 10.55,51.56 10.67,51.68 v10.67,60.73 | v85.65,17.07 85.67,17.07 98.27,29.67 98.27,37.16 v98.98,37.87 | 68.43,89.23 90.98,66.68 90.98,59.36 v90.96,59.33
EPD_CS  (via drill 0.35)
  Top 0.152: U2.11 20.27,41.68 20.27,32.54 21.34,31.47 21.18,31.32 21.18,30.4 TP10.TP 21.34,30.25 21.95,30.25 28.8,23.39 v62.33,23.39 | J1.12 84.12,15.32 84.12,15.9 v83.65,16.38 | R9.1 75.59,26.29 74.98,26.9 72.7,26.9 72.52,27.07 72.52,28.25 v72.69,28.42 | v108.97,48.84 112.32,52.2 112.32,52.96 D6.2
  Bottom 0.152: 80.16,19.89 74.07,25.98 74.07,26.59 74.37,26.9 74.52,26.9 74.83,27.2 74.83,27.81 74.22,28.42 v72.69,28.42 67.67,23.39 v62.33,23.39 | v108.97,48.84 82.14,22.02 82.14,21.87 80.16,19.89 | 80.16,19.89 83.65,16.4 v83.65,16.38
EPD_DC  (via drill 0.35)
  Top 0.152: v84.89,13.94 84.58,14.25 84.58,15.16 J1.11 | v13.56,11.2 13.26,10.89 12.5,10.89 12.19,10.59 TP11.TP | v12.65,40.31 12.65,41.68 U2.5
  Bottom 0.152: v13.56,11.2 14.02,11.66 | v12.65,40.31 12.65,13.03 14.02,11.66 | v84.89,13.94 84.46,13.94 82.17,11.66 14.02,11.66
EPD_RST  (via drill 0.35)
  Top 0.152: 20.42,2.97 21.34,2.97 21.64,3.28 52.81,3.28 64.52,14.98 v64.95,14.98 | J1.10 85.04,15.32 85.04,15.92 v84.56,16.41 | v13.56,43.36 16.46,46.25 16.46,59.21 U2.21 | v13.56,13.03 13.56,12.11 20.12,5.56 20.12,4.19 20.42,3.88 20.42,2.97 | 20.42,2.97 TP12.TP
  Bottom 0.152: v13.56,13.03 v13.56,43.36 | v64.95,14.98 64.97,15.01 83.16,15.01 v84.56,16.41
FLASH_CS  (via drill 0.35)
  Top 0.152: v56.84,13.64 57.45,13.03 57.45,12.27 58.22,11.5 58.83,11.5 R5.1 | v39.93,30.71 39.32,31.32 38.86,31.32 D9.2 | v37.19,51.89 37.49,51.89 37.95,52.35 U1.1 | v22.4,43.2 21.95,43.2 21.49,42.75 21.49,41.83 U2.12
  Bottom 0.152: v56.84,13.64 39.93,30.56 v39.93,30.71 39.93,40.78 37.97,42.74 37.95,42.74 37.19,43.51 | 37.19,43.51 v37.19,51.89 | v22.4,43.2 23.01,42.59 36.27,42.59 37.19,43.51
GDR
  Top 0.152: J1.2 89,15.32 89,15.92 85.35,19.58 68.11,19.58 68.09,19.56 67.08,19.56 65.23,21.41 64.77,21.41 R4.1 64.62,21.41 64.31,21.41 62.64,19.73 61.87,19.73 61.42,19.28 61.42,18.67 Q3.1
GND  (via drill 0.35)
  Top 0.152: U2.29_5 13.11,49.15 12.04,49.15 U2.29_2 | U4.6 131.51,55.73 131.19,55.73 131.08,55.84 U4.9 130.28,56.22 130.28,56.3 129.99,56.59 U4.1 | U2.29_3 11.99,50.31 | 11.99,50.31 U2.29_6 | U2.29_6 U2.29_9 U2.29_8 | U2.29_5 13.29,49.06 | 13.29,49.06 U2.29_8 | U2.29_4 U2.29_7 U2.29_8 | U2.29_4 U2.29_1 U2.29_2 | U2.29_2 11.99,49.14 11.99,50.31 | U2.29_6 13.16,49.19 13.29,49.06 | U2.29_4 U2.29_5
  other vias: 148.29,51.54 146.79,45.44 141.29,52.74 130.89,52.44 139.19,44.24 116.99,49.84 118.09,44.84 115.49,53.24 111.69,48.94 117.29,37.54 96.39,46.24 101.19,45.54 103.59,52.74 103.99,40.24 86.89,38.54 96.49,34.04 79.29,22.24 77.29,21.54 74.09,21.04 54.99,17.04 52.69,14.44 58.19,14.04 64.09,12.34 60.99,7.94 38.89,28.04 42.19,30.84 46.09,28.04 45.49,39.44 42.59,44.14 39.09,46.44 33.79,48.04 7.49,38.54 13.49,46.24 7.59,43.44 84.89,49.34 90.79,50.84 94.49,47.14 81.19,17.04 74.99,12.54 74.69,10.74 71.19,16.04 77.69,12.64 88.09,13.84 89.89,12.24 92.49,10.94 12.29,44.34
  pour Top: 6.63,38.58 6.61,38.56 0.27,38.56 0.25,38.58 0.07,38.76 0.07,0.07 0.22,-0.08 74.36,-0.08 74.51,0.07 74.51,9.91 74.43,10 74.41,10.02 74.41,10.06 74.43,10.08 74.45,10.1 74.47,10.12 92.81,10.12 92.83,10.1 92.95,9.98 92.97,9.96 92.97,0.02 169.96,0.02 170.01,0.07 170.01,67.06 170.02,67.06 92.37,67.06 92.35,67.08 92.23,67.2 92.21,67.22 92.21,111.06 68.17,111.06 68.17,111.07 68.17,109.12 68.15,109.1 67.93,108.88 67.91,108.86 21.97,108.86 21.95,108.88 21.93,108.9 21.91,108.92 21.91,110.96 0.47,110.96 0.45,110.98 0.27,111.16 0.27,61.32 0.25,61.3 0.1,61.14 0.22,61.02 6.61,61.02 6.63,61 6.65,60.98 6.67,60.96 6.67,38.62 6.65,38.6
  pour Bottom: 6.83,38.18 6.81,38.16 0.27,38.16 0.25,38.18 0.07,38.36 0.07,-0.28 74.16,-0.28 74.51,0.07 74.51,9.96 74.53,9.98 74.55,10 74.57,10.02 92.81,10.02 92.83,10 92.85,9.98 92.87,9.96 92.87,-0.18 169.76,-0.18 170.21,0.27 170.21,66.86 92.37,66.86 92.35,66.88 92.13,67.1 92.11,67.12 92.11,111.06 92.12,111.06 68.22,111.06 68.07,110.91 68.07,108.82 68.05,108.8 68.03,108.78 68.01,108.76 22.17,108.76 22.15,108.78 22.03,108.9 22.01,108.92 22.01,111.16 0.16,111.16 0.17,111.16 0.17,61.62 0.15,61.6 0.07,61.52 6.91,61.52 6.93,61.5 6.95,61.48 6.97,61.46 6.97,38.32 6.95,38.3
GPIO8
  Top 0.152: R1.2 19.05,41.53 18.9,41.68 U2.10
I2C_PW  (via drill 0.35)
  Top 0.152: C1.1 154.38,7.54 151.79,7.54 C2.1 151.64,7.54 151.18,7.54 150.11,8.61 150.11,12.42 SENSOR2.8 150.11,12.57 v150.11,13.79 150.72,14.4 | 150.72,14.4 151.03,14.7 150.88,14.86 150.88,15.32 SENSOR2.2 | 150.72,14.4 151.79,13.33 151.79,12.57 SENSOR2.6 | U2.17 21.34,59.21 21.34,58.6 24.99,54.94 24.99,30.71 31.7,24 32.92,24 33.22,24.31 33.22,24.46 34.75,25.98 35.36,25.98 R2-PINH.2 35.51,26.14 35.66,26.29 35.81,26.29 36.27,25.83 36.27,25.37 37.79,23.85 39.62,23.85 54.86,39.09 79.9,39.09 82.04,41.22 82.14,41.22 89.15,48.23 | 89.15,48.23 89.15,48.39 R1_PINH.2 89.15,48.23 | 89.15,48.23 90.6,48.23 97.92,40.91 97.92,37.25 98.88,36.29 v98.88,35.86
  Bottom 0.152: v150.11,13.79 121.01,13.79 98.93,35.86 v98.88,35.86
INT_RTC  (via drill 0.35)
  Top 0.152: v36.88,25.68 37.79,24.76 38.41,24.76 R1_PINH1.1 | v16.61,40.46 16.61,41.53 16.46,41.68 U2.8 | v25.6,37.41 25.6,59.82 36.27,70.48 TP15.TP 44.2,62.84 v44.2,62.79 | U3.3 87.02,60.42 87.02,61.49 85.65,62.86 76.56,62.86 v76.53,62.89
  Bottom 0.152: 23.47,35.28 20.73,38.02 17.68,38.02 16.61,39.09 v16.61,40.46 | 23.47,35.28 v25.6,37.41 | v36.88,25.68 34.31,25.68 34.24,25.61 33.14,25.61 23.47,35.28 | v44.2,62.79 44.27,62.86 76.5,62.86 v76.53,62.89
IO/BOOT  (via drill 0.35)
  Top 0.152: C6.1 34.44,106.15 33.68,106.15 32.46,107.36 31.85,107.36 BOOT_BUTTON.3 31.7,107.36 28.35,107.36 BOOT_BUTTON.4 28.19,107.36 26.98,107.36 | 26.98,107.36 26.06,107.36 R_BOOT.2 | v24.08,73.99 24.08,59.36 U2.15 | 26.98,107.36 v26.98,106.91
  Bottom 0.152: v24.08,73.99 24.08,104.01 v26.98,106.91
IO/CHANGE
  Top 0.152: C10.1 49.38,105.99 48.77,105.99 48.01,106.76 48.01,106.91 47.55,107.36 46.94,107.36 CHANGE_BUTTON.3 46.79,107.36 43.43,107.36 CHANGE_BUTTON.4 43.28,107.36 42.98,107.06 41.3,107.06 R_CHANGE.2 41.15,107.21 40.54,107.21 39.47,106.15 39.47,90.3 13.87,64.69 13.87,59.36 U2.23
MISO  (via drill 0.35)
  Top 0.152: v74.68,26.29 73.3,26.29 R8.1 | v81.53,22.17 82.14,21.56 82.14,21.11 D12.2 | 7.01,93.95 7.16,94.11 7.16,102.18 6.25,103.1 TP6.TP | 7.01,93.95 6.86,93.8 5.94,93.8 J4.P7 | v26.21,51.28 37.95,51.28 U1.2 38.1,51.28 38.41,51.28 v38.94,51.81 | v9.3,57.99 8.69,58.6 8.69,59.21 U2.27 | v7.29,92 7.29,93.67 7.01,93.95
  Bottom 0.152: 75.13,26.29 77.42,26.29 v81.53,22.17 | 75.13,26.29 v74.68,26.29 | 75.13,26.29 75.13,27.96 51.36,51.74 39.01,51.74 v38.94,51.81 | v7.29,92 7.29,64.44 6.32,63.47 4.96,63.47 4.42,62.94 4.42,62.18 4.96,61.65 5.64,61.65 v9.3,57.99 9.3,51.69 10.78,50.2 11.74,50.2 12.81,51.28 v26.21,51.28
MOSI  (via drill 0.35)
  Top 0.152: v32.46,32.54 31.85,31.93 31.85,31.47 D11.2 | v18.44,39.55 16.61,39.55 15.09,41.07 15.09,41.68 U2.7 | v5.18,59.97 5.49,60.27 5.49,61.49 4.72,62.25 4.72,89.08 4.88,89.23 5.79,89.23 J4.P3 | TP7.TP 76.81,96.7 76.81,90.67 v66.14,80.01 | v37.72,37.72 37.72,40.73 45.52,48.54 45.72,48.54 U1.5 45.87,48.54 46.02,48.69 46.02,48.84 v50.14,52.96 50.14,63.86 50.21,63.93 v50.21,64 | v83.06,18.67 83.06,16.65 83.04,16.63 83.04,15.22 J1.14 | v87.73,26.69 87.67,26.75 84.12,26.75 83.71,27.16 R7.1 82.98,27.51 82.03,27.51 v81.11,26.59
  Bottom 0.152: v83.06,18.67 83.06,22.02 v87.73,26.69 | v5.18,59.97 6.65,58.5 6.65,48.96 6.54,48.84 6.54,45.19 7.59,45.19 9.21,46.81 11.18,46.81 v18.44,39.55 25.45,39.55 v32.46,32.54 37.64,37.72 v37.72,37.72 | v50.14,52.96 50.6,52.96 76.2,27.35 80.35,27.35 v81.11,26.59 | v66.14,80.01 66.14,79.93 v50.21,64
N$2  (via drill 0.35)
  Top 0.152: R2-USB1.2 148.44,43.81 148.44,44.42 148.67,44.66 v148.67,44.73 | J2.A5 163.53,53.11 163.06,53.11 154.85,44.9 v150.4,44.9
  Bottom 0.152: v148.67,44.73 150.23,44.73 v150.4,44.9
N$3  (via drill 0.35)
  Top 0.152: v147.07,41.07 147.07,42.14 R2-USB.1 | v160.56,54.2 162.36,56.01 163.53,56.01 J2.B5
  Bottom 0.152: v147.07,41.07 147.43,41.07 v160.56,54.2
N$4
  Top 0.152: 94.03,38.02 93.88,38.02 D3.2 94.03,38.02 | 94.03,38.02 94.34,38.02 95.86,39.55 96.62,39.55 C4.1 | 94.03,38.02 90.37,34.36 90.37,33.75 D4.1
N$6
  Top 0.152: R1_BAT.1 107.29,53.26 107.29,53.87 108.2,54.79 119.18,54.79 119.79,54.18 119.79,52.04 120.09,51.74 120.85,51.74 MCP73831.1
N$7  (via drill 0.35)
  Top 0.152: v158.04,57.53 157.12,57.53 CHG_LED.C | v109.42,53.72 108.81,53.11 108.51,53.11 R1_BAT.2
  Bottom 0.152: v158.04,57.53 134.57,57.53 133.75,56.71 133.19,56.71 132.74,57.16 132.74,57.51 132.38,57.86 131.88,57.86 130.38,56.36 112.06,56.36 v109.42,53.72
N$8
  Top 0.152: R2_BAT.2 114,50.82 114.3,50.82 117.2,53.72 117.2,54.18 117.5,54.48 119.02,54.48 119.33,54.18 119.33,53.11 118.11,51.89 118.26,51.74 MCP73831.5
N$9
  Top 0.152: J1.24 78.03,15.16 78.03,14.55 79.25,13.33 88.85,13.33 90.22,14.7 90.22,15.77 86.11,19.89 86.11,20.34 85.95,20.5 EPD_C12.1
N$10  (via drill 0.35)
  Top 0.152: v83.67,20.19 82.91,20.19 82.75,20.04 77.49,20.04 71.55,25.98 71.55,26.06 v70.1,27.51 | v69.65,28.88 69.04,28.27 68.58,28.27 EPD_C2.1 | J1.5 87.63,15.32 87.63,15.94 85.9,17.67 85.88,17.67 v84.89,18.67
  Bottom 0.152: v84.89,18.67 84.89,18.97 v83.67,20.19 | v70.1,27.51 70.1,28.42 v69.65,28.88
N$11
  Top 0.152: J1.22 79.1,15.32 79.1,15.92 78.64,16.38 77.57,16.38 77.11,15.92 77.11,14.65 79.04,12.72 89.15,12.72 90.83,14.4 90.83,17.91 88.54,20.19 88.54,20.34 88.7,20.5 EPD_C10.1
N$12  (via drill 0.35)
  Top 0.152: v52.88,97 53.19,97.31 53.19,97.76 53.34,97.92 IC1.5 | C_DELAY.1 41.15,41.68 41.6,41.68 50.82,50.89 50.82,64.26 50.75,64.33 v50.75,80.77
  Bottom 0.152: v52.88,97 50.75,94.87 v50.75,80.77
N$13
  Top 0.152: J1.20 80.01,15.32 80.01,15.92 78.94,16.99 77.27,16.99 76.5,16.23 76.5,14.47 79.31,11.66 90.83,11.66 91.44,12.27 91.44,20.34 EPD_C8.1
N$14
  Top 0.152: J1.19 80.62,15.32 80.62,15.92 79.25,17.3 77.11,17.3 76.2,16.38 76.2,12.27 77.11,11.35 90.98,11.35 92.05,12.42 92.05,19.28 92.66,19.89 92.66,20.34 92.81,20.5 EPD_C7.1
N$15  (via drill 0.35)
  Top 0.152: v81.69,14.25 81.23,14.25 81.08,14.4 81.08,15.16 J1.18 | EPD_C6.1 94.08,20.29 v94.08,19.45
  Bottom 0.152: v81.69,14.25 82.3,13.64 83.29,13.64 85.65,16 90.55,16 94,19.45 v94.08,19.45
N$16  (via drill 0.35)
  Top 0.152: v86.72,14.25 87.78,14.25 88.09,14.55 88.09,15.16 J1.4 | EPD_C1.1 65.99,28.27 65.84,28.12 65.84,25.98 60.66,20.8 60.66,18.06 62.62,16.1 v62.62,15.47
  Bottom 0.152: v86.72,14.25 86.41,14.25 86.11,14.55 84.63,14.55 83.42,13.33 64.77,13.33 62.64,15.47 v62.62,15.47
N$17
  Top 0.152: R_CAPACITOR.2 89.92,63.17 89.92,63.93 88.7,65.15 88.39,65.15 D7.1
PREVGH  (via drill 0.35)
  Top 0.152: 90.22,20.5 90.37,20.34 90.37,19.89 91.13,19.12 91.13,14.25 89.31,12.42 78.95,12.42 76.81,14.56 76.81,16.08 77.42,16.69 78.79,16.69 79.55,15.92 79.55,15.32 J1.21 | v76.81,39.7 76.81,42.9 D5.1 | v84.89,25.68 85.95,25.68 89.46,22.17 89.46,21.26 90.22,20.5 | 90.22,20.5 EPD_C9.1
  Bottom 0.152: v76.81,39.7 76.81,33.75 v84.89,25.68
PREVGL  (via drill 0.35)
  Top 0.152: 87.48,19.89 90.53,16.84 90.53,14.55 89,13.03 79.16,13.03 77.42,14.77 77.42,15.77 77.72,16.08 78.33,16.08 78.64,15.77 78.64,15.32 J1.23 | 87.48,19.89 87.48,20.34 87.33,20.5 EPD_C11.1 | v87.33,19.58 87.33,19.73 87.48,19.89 | D4.2 93.73,33.72 v93.73,32.31
  Bottom 0.152: v87.33,19.58 93.73,25.98 v93.73,32.31
RESE  (via drill 0.35)
  Top 0.152: 65.38,19.89 64.31,19.89 62.79,18.36 62.64,18.52 Q3.2 | 65.38,19.89 66.29,19.89 66.93,19.25 68.22,19.25 68.24,19.27 85.19,19.27 88.54,15.92 88.54,15.32 J1.3 | v67.82,22.17 67.51,22.48 66.75,22.48 R3.1 | 65.38,19.89 v65.38,20.04
  Bottom 0.152: v67.82,22.17 67.51,22.17 v65.38,20.04
RESE'  (via drill 0.35)
  Top 0.152: 56.24,14.7 56.24,11.96 56.39,11.81 SJ1.2 | 56.24,14.7 56.24,15.01 R2.2 56.24,14.7 | 56.24,14.7 v57.15,15.62 | R3.2 66.75,21.26 66.75,20.95 67.51,20.19 67.82,20.19 v67.84,20.17
  Bottom 0.152: v67.84,20.17 67.79,20.17 63.73,16.1 57.63,16.1 v57.15,15.62
RESET  (via drill 0.35)
  Top 0.152: C5.1 66.14,105.99 65.53,105.99 65.23,106.3 65.23,106.76 64.62,107.36 64.01,107.36 RESET_BUTTON.3 63.86,107.36 60.5,107.36 RESET_BUTTON.4 60.35,107.36 59.89,107.36 59.44,106.91 | 59.44,106.91 59.13,106.6 59.13,105.84 59.28,105.69 59.28,105.54 51.66,97.92 50.75,97.92 IC1.1 50.6,97.92 49.99,97.92 49.6,97.53 v49.58,97.53 | 59.44,106.91 58.98,107.36 58.37,107.36 R_RESET.2 | v10.67,61.64 9.6,60.58 6.55,60.58 6.25,60.27 6.25,46.4 9.91,42.75 9.91,41.83 U2.3
  Bottom 0.152: v49.58,97.53 15.21,63.17 5.08,63.17 4.73,62.81 4.73,62.31 5.08,61.95 10.36,61.95 v10.67,61.64
RTC_RST  (via drill 0.35)
  Top 0.152: v24.99,58.14 23.01,58.14 22.71,58.44 22.71,59.21 U2.16 | v85.34,58.75 85.8,59.21 85.8,60.27 U3.4
  Bottom 0.152: v24.99,58.14 84.73,58.14 v85.34,58.75
RX
  Top 0.152: U2.24 12.65,59.36 12.65,64.69 15.85,67.89 15.85,68.81 TP2.TP
SCK  (via drill 0.35)
  Top 0.152: v79.25,14.25 79.86,13.64 82.91,13.64 83.67,14.4 83.67,15.16 J1.13 | 63.55,15.47 63.55,15.92 65.38,17.75 65.38,17.91 65.23,18.06 R6.1 | 36.42,32.84 35.36,31.77 35.36,31.32 D10.2 | v21.03,43.2 14.33,43.2 13.87,42.75 13.87,41.83 U2.6 | J4.P5 5.79,91.36 4.88,91.36 4.42,90.91 4.42,61.64 4.88,61.19 v4.88,61.04 | TP8.TP 71.63,96.54 65.23,90.14 v65.23,80.01 | 63.55,15.47 62.94,14.86 58.83,14.86 50.9,22.78 v46.48,22.78 | 36.42,32.84 v36.35,32.84 | 63.55,15.47 v63.52,15.49 | v37.72,42.14 38.1,42.14 44.2,48.23 44.2,48.39 45.11,49.3 45.41,49.3 45.72,49.61 45.72,49.91 U1.6 45.72,50.06 46.18,50.52 46.33,50.52 49.61,53.8 49.61,64.31 50.14,64.84 v50.14,64.91 | 36.42,32.84 36.42,39.78 v36.35,39.85
  Bottom 0.152: v79.25,14.25 64.77,14.25 v63.52,15.49 | 36.42,39.85 37.64,41.07 37.64,42.06 v37.72,42.14 | 36.42,39.85 35.51,40.77 23.93,40.77 21.49,43.2 v21.03,43.2 15.72,48.51 10.48,48.51 8.36,50.63 8.36,55.88 6.96,57.28 6.96,59.05 4.97,61.04 v4.88,61.04 | v46.48,22.78 36.42,32.84 v36.35,32.84 | v36.35,39.85 36.42,39.85 | v50.14,64.91 v65.23,80 v65.23,80.01
SCL  (via drill 0.35)
  Top 0.152: R2-PINH.1 35.36,24.92 34.29,24.92 33.07,23.7 31.55,23.7 24.69,30.56 24.69,51.43 v24.23,51.89 17.53,58.6 17.53,59.21 U2.20 | 133.54,54.9 132.28,56.16 132.13,56.01 131.67,56.01 U4.7 | 133.54,54.9 145.69,42.75 v145.69,39.7 | J3.4 164.29,20.8 164.29,21.11 v163.68,21.72 157.43,15.47 152.55,15.47 SENSOR2.4 | v90.37,48.84 89.61,49.61 89.61,50.98 U3.16 89.61,51.13 89.61,52.04 89,52.65 85.34,52.65 83.52,54.48 v83.06,54.48 | 133.54,54.9 v132.79,54.14
  Bottom 0.152: v163.68,21.72 v145.69,39.7 | v90.37,48.84 106.38,48.84 111.68,54.14 v132.79,54.14 | v24.23,51.89 33.07,51.89 35.66,54.48 v83.06,54.48
SD0805S020S1R0
  Top 0.152: 116.43,40.77 116.74,40.46 117.35,40.46 IC4.3 | 116.43,40.77 116.43,41.83 117.04,42.44 117.2,42.44 117.35,42.29 IC4.1 | 112.32,37.26 112.47,37.26 C1_BAT1.1 112.32,37.26 | 112.32,37.26 112.17,37.26 100.99,26.08 87.48,26.08 87.28,26.29 81.66,26.29 81.36,25.99 80.86,25.99 80.65,26.2 Q1.2 | 113.08,40.16 113.08,38.33 112.32,37.56 112.32,37.26 | 116.43,40.77 114.15,40.77 113.54,40.16 113.08,40.16 | 113.08,40.16 D2.1
SDA  (via drill 0.35)
  Top 0.152: 141.43,47.47 146.3,42.59 146.3,21.56 151.79,16.08 151.79,15.47 SENSOR2.3 | 141.43,47.47 132.28,56.62 131.67,56.62 U4.8 | 87.94,48.69 87.94,49.45 88.09,49.61 | 87.94,48.69 87.94,48.54 R1_PINH.1 87.94,48.69 | 88.09,49.61 88.24,49.76 88.24,50.98 U3.15 | v23.93,55.09 22.25,55.09 18.9,58.44 18.9,59.21 U2.19 | v74.68,55.09 81.08,48.69 87.94,48.69 | v88.85,49.45 88.24,49.45 88.09,49.61 | v141.75,47.76 141.71,47.76 141.43,47.47
  Bottom 0.152: v74.68,55.09 v23.93,55.09 | v88.85,49.45 106.07,49.45 112.47,55.85 132.89,55.85 133.4,55.35 133.4,53.06 139.9,46.56 140.51,46.56 141.71,47.76 v141.75,47.76
SRC  (via drill 0.35)
  Top 0.152: v81.38,42.75 80.47,42.75 80.31,42.9 D5.2 | C4.2 v83.21,40.92 83.21,39.37 L1.1 80.92,38.48 79.1,38.48 72.85,32.23 72.85,31.16 69.19,27.51 68.12,27.51 62.03,21.41 62.03,20.8 Q3.3
  Bottom 0.152: v81.38,42.75 v83.21,40.92
SS_SD  (via drill 0.35)
  Top 0.152: v39.32,38.17 43.89,42.75 44.35,42.75 D8.2 | R10.1 32.31,24.92 32.92,24.92 33.98,25.98 v33.98,26.21 | v17.98,38.63 13.41,38.63 11.28,40.77 11.28,41.68 U2.4 11.28,41.83 11.28,50.99 v11.16,51.11 | v5.33,62.56 7.47,64.69 7.47,87.86 7.16,88.16 6.4,88.16 J4.P2
  Bottom 0.152: 33.98,31.93 33.98,32.84 v39.32,38.17 | v17.98,38.63 25.45,38.63 32.16,31.93 33.98,31.93 | v5.33,62.56 15.53,62.56 20.62,67.64 20.62,60.57 v11.16,51.11 | 33.98,31.93 v33.98,26.21
TX
  Top 0.152: U2.25 11.28,59.36 11.28,66.83 12.34,67.89 12.34,68.35 TP1.TP
USB_D+  (via drill 0.35)
  Top 0.152: v24.08,43.81 24.08,41.83 U2.14 | D1.1 146.61,49.91 145.85,49.91 144.94,49 141.75,49 v133.44,57.31
  Bottom 0.152: v24.08,43.81 25.45,43.81 35.51,53.87 84.73,53.87 87.94,57.07 130.66,57.07 131.75,58.17 132.51,58.17 133.36,57.31 v133.44,57.31
USB_D-  (via drill 0.35)
  Top 0.152: v23.32,43.2 22.71,42.59 22.71,41.83 U2.13 | D1.3 146.61,48.08 146,48.08 145.57,48.51 v145.57,48.72
  Bottom 0.152: v23.32,43.2 25.3,43.2 35.66,53.57 50.44,53.57 55.78,48.23 106.22,48.23 109.14,51.15 127.88,51.15 132.78,46.25 141.12,46.25 143.56,48.69 145.54,48.69 v145.57,48.72
VBAT  (via drill 0.35)
  Top 0.305: TP3.TP 74.22,31.01 71.93,28.73 71.93,26.14 72.69,25.37 76.2,25.37 76.66,25.83 76.66,26.2 77.36,26.9 78.73,26.9 78.97,27.15 Q1.3 80.34,27.28 82.11,29.05 | U4.3 129.68,55.65 129.68,55.69 U4.2 129.54,55.96 129.44,55.96 v127.02,53.54 | 122.07,53.26 121.61,53.72 121.01,53.72 MCP73831.3 | 122.07,53.26 123.07,52.26 123.07,51.37 119.48,47.78 118.87,47.78 C2_BAT.1 118.72,47.78 118.18,47.78 117.73,47.32 v117.65,47.32 | v110.49,40.16 97.54,27.2 88.29,27.2 88.18,27.2 88.09,27.2 87.3,28 v84.63,28 84.69,28.05 | 122.07,53.26 122.15,53.34 v122.15,53.42 | 82.16,29 82.11,29.05 | 82.11,29.05 82.38,29.05 v82.73,28.7
  Bottom 0.305: v122.15,53.42 122.22,53.42 122.35,53.54 v127.02,53.54 | v117.65,47.32 v110.49,40.16 | v82.73,28.7 83.44,28 v84.63,28
VBUS  (via drill 0.35)
  Top 0.305: 151.49,51.74 151.64,51.74 155.91,56.01 156.97,56.01 CHG_LED.A | 151.49,51.74 151.33,51.89 C5_USB.1 151.49,51.74 | 147.52,47.32 146,47.32 144.93,48.39 144.47,48.39 C4_USB.1 144.25,48.54 141.22,48.54 v141.02,48.74 | 147.52,47.32 148.13,47.93 148.13,48.69 148.59,49.15 149.2,49.15 D1.5 149.35,49.15 150.11,49.15 150.27,49.3 150.27,50.52 151.49,51.74 | 126.34,54.94 126.8,54.94 129.08,57.23 132.1,57.23 v132.13,57.26 | 126.34,54.94 124.97,54.94 C1_BAT.1 | 147.52,47.32 149.35,45.49 149.35,41.53 148.59,40.77 148.59,39.39 PFMF.050.1.2 | 101.65,34.06 110.19,42.59 110.34,42.59 110.49,42.44 R1_PWRUSB.2 110.64,42.44 112.93,42.44 D2.2 113.08,42.44 113.23,42.59 113.23,48.23 114.45,49.45 | 101.65,34.06 99.21,31.62 81.46,31.62 Q1.1 | 114.45,49.45 118.26,53.26 118.26,53.57 MCP73831.4 | 101.65,34.06 98.3,37.41 98.3,41.88 90.13,50.05 90.13,52.1 89.2,53.03 85.5,53.03 83.37,55.17 83.29,55.17 59.51,78.94 59.43,78.94 58.45,79.92 TP14.TP | 114.45,49.45 117.27,46.64 119.11,46.64 120.7,48.23 127.62,48.23 128.43,49.04 128.43,50.71 126.34,52.8 126.34,54.94
  Bottom 0.305: v141.02,48.74 140.62,48.74 132.13,57.23 v132.13,57.26
VRTC  (via drill 0.35)
  Top 0.305: 92.35,52.2 96.01,52.2 96.16,52.35 CPH3225A.1 | 92.35,52.2 92.05,52.2 C8.1 92.35,52.2 | 92.35,52.2 91.13,53.42 | 91.13,53.42 87.63,56.92 87.63,61.49 88.54,62.41 88.54,63.02 R_CAPACITOR.1 | v87.02,49.3 87.02,50.98 U3.14 | 91.13,53.42 v90.98,53.26
  Bottom 0.305: v90.98,53.26 v87.02,49.3
VUSB  (via drill 0.35)
  Top 0.305: PFMF.050.1.1 143.98,37.05 144.99,36.04 v144.99,35.94 | J2.B4 J2.A9 163.49,56.74 162.49,56.74 162.19,57.04 v161.29,57.04 | J2.A4 J2.B9 162.5,52.05 161.79,51.34 v161.79,50.54 161.79,48.44 v148.39,35.04
  Bottom 0.305: v161.29,57.04 161.79,56.54 v161.79,50.54 | v144.99,35.94 147.49,35.94 v148.39,35.04